# EAGLE board schematic2 (EAGLE 9.5.1)
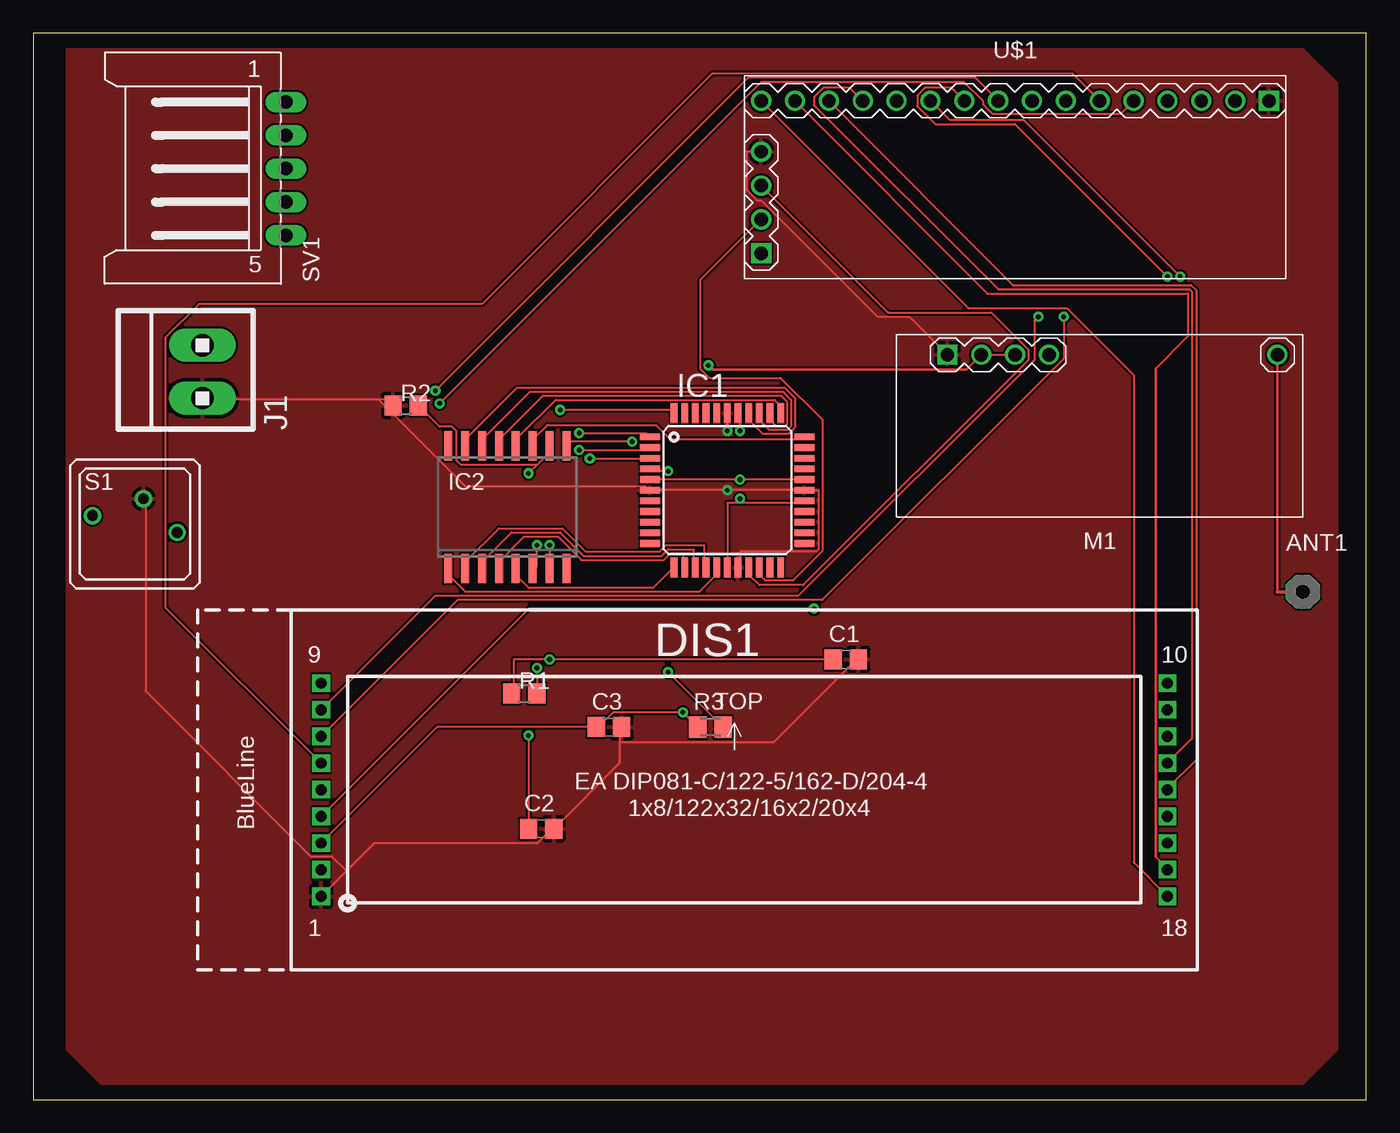
[diagram p0: board, top side]
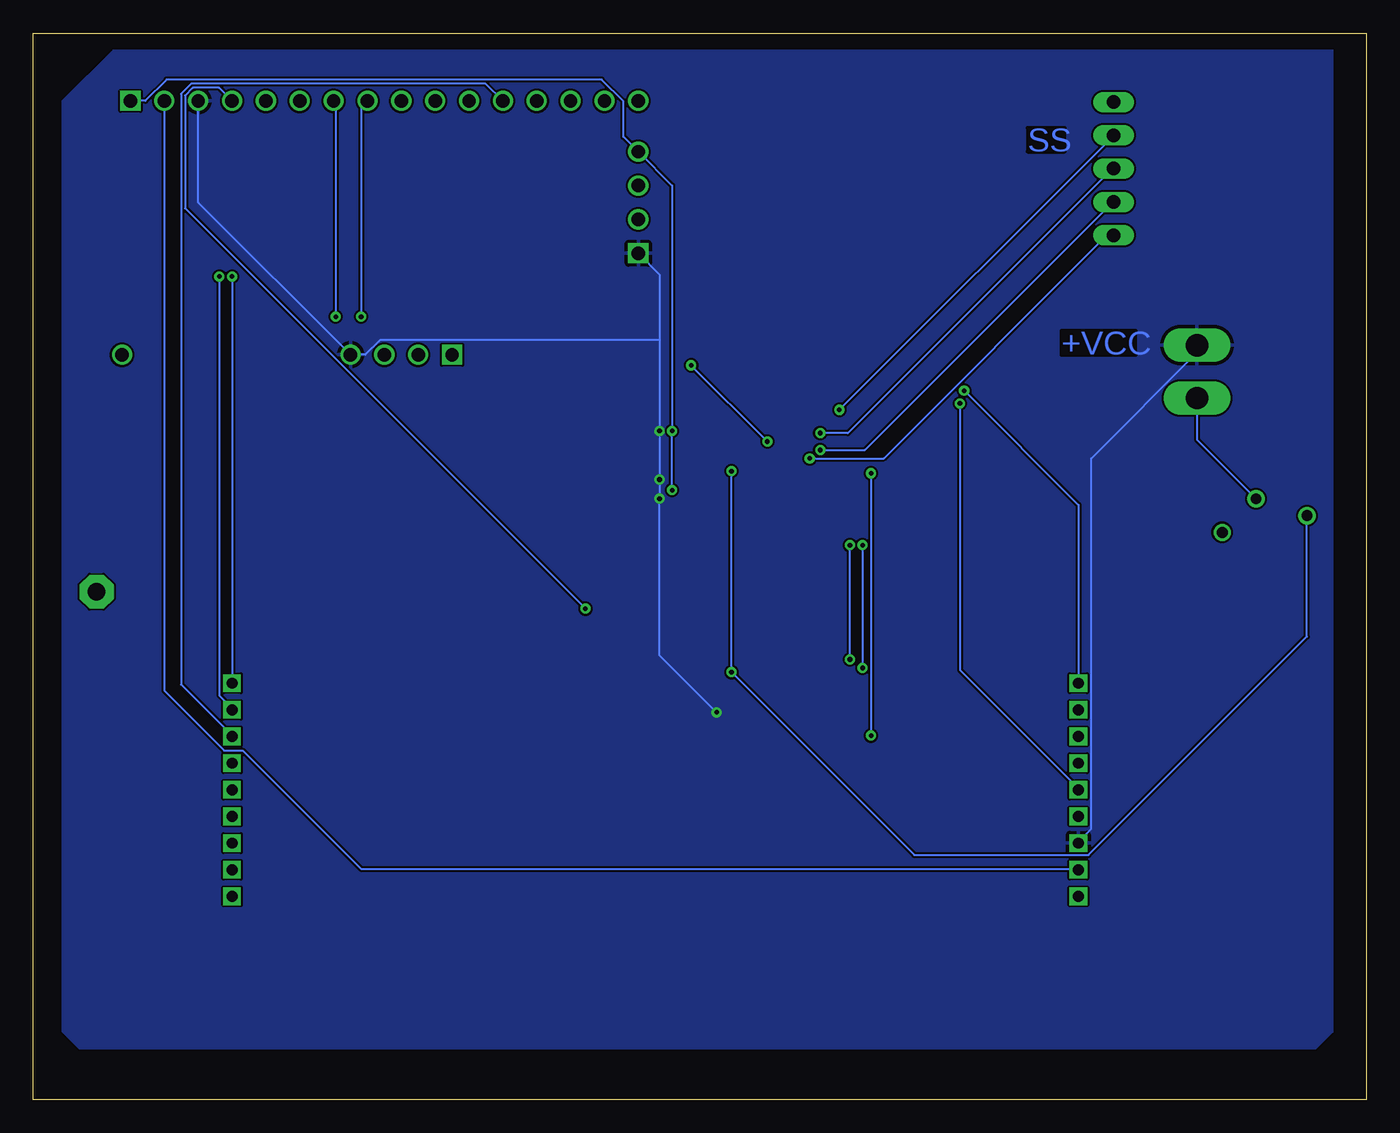
[diagram p1: board, bottom side, seen from below]

Size 100 x 80 mm. Coordinates in mm from the lower left corner, seen from the top.
Outline: 0,0 100,0 100,80 0,80 0,0
Copper layers (1*16): Top 0.035mm / dielectric 1.5mm / Bottom 0.035mm
Design rules "default": minimum track width 6mil, minimum drill 0.35mm, track to track 6mil, track to pad 6mil, pad to pad 6mil, via to via 6mil, smd to smd 6mil, copper to edge 40mil, drill to drill 6mil, minimum pad ring 10mil, minimum via ring 8mil, stop-mask expansion 4mil, vias tented up to drill 0mil, thermal gap 10mil

## Footprints (pad centres in the part's own frame; a part is rotated, then mirrored left to right if it is on the bottom)
PAD-01 = drill 1.321 pad 2.54 octagon: 1 0,0
C0805 = smd 1.3 x 1.5: 1 -0.95,0; 2 0.95,0
EA_DIP = drill 0.813 pad 1.27 square: 1 0,0; 2 0,2; 3 0,4; 4 0,6; 5 0,8; 6 0,10; 7 0,12; 8 0,14; 9 0,16; 10 63.5,16; 11 63.5,14; 12 63.5,12; 13 63.5,10; 14 63.5,8; 15 63.5,6; 16 63.5,4; 17 63.5,2; 18 63.5,0
TQFP44 = smd 1.5 x 0.5: 1 -5.8,4; 2 -5.8,3.2; 3 -5.8,2.4; 4 -5.8,1.6; 5 -5.8,0.8; 6 -5.8,0; 7 -5.8,-0.8; 8 -5.8,-1.6; 9 -5.8,-2.4; 10 -5.8,-3.2; 11 -5.8,-4; 23 5.8,-4; 24 5.8,-3.2; 25 5.8,-2.4; 26 5.8,-1.6; 27 5.8,-0.8; 28 5.8,0; 29 5.8,0.8; 30 5.8,1.6; 31 5.8,2.4; 32 5.8,3.2; 33 5.8,4 | smd 0.5 x 1.5: 12 -4,-5.8; 13 -3.2,-5.8; 14 -2.4,-5.8; 15 -1.6,-5.8; 16 -0.8,-5.8; 17 0,-5.8; 18 0.8,-5.8; 19 1.6,-5.8; 20 2.4,-5.8; 21 3.2,-5.8; 22 4,-5.8; 34 4,5.8; 35 3.2,5.8; 36 2.4,5.8; 37 1.6,5.8; 38 0.8,5.8; 39 0,5.8; 40 -0.8,5.8; 41 -1.6,5.8; 42 -2.4,5.8; 43 -3.2,5.8; 44 -4,5.8
SO16W = smd 0.6 x 2.2: 1 -4.445,-4.6; 2 -3.175,-4.6; 3 -1.905,-4.6; 4 -0.635,-4.6; 5 0.635,-4.6; 6 1.905,-4.6; 7 3.175,-4.6; 8 4.445,-4.6; 9 4.445,4.6; 10 3.175,4.6; 11 1.905,4.6; 12 0.635,4.6; 13 -0.635,4.6; 14 -1.905,4.6; 15 -3.175,4.6; 16 -4.445,4.6
1X2MTA = drill 1.676 long: 1 1.981,0; 2 -1.981,0
WIRELESS-XY-MK-5V = drill 1 square: 1 11.43,-5.08 | drill 1: 2 8.89,-5.08; 3 6.35,-5.08; 4 3.81,-5.08; ANT -13.335,-5.08
R0805 = smd 1.3 x 1.5: 1 -0.95,0; 2 0.95,0
M0805 = smd 1.3 x 1.6: 1 -0.95,0; 2 0.95,0
RDT1034 = drill 0.8: A 3.175,-0.635; A1 -3.175,0.635; B 0.65,1.9
L05P = drill 1.016 long: 1 5,-6.25; 2 2.5,-6.25; 3 0,-6.25; 4 -2.5,-6.25; 5 -5,-6.25
LCD-I2C-CONVERTER = drill 1 square: J1.1 -19.05,-5.08; J2.1 19.05,6.35 | drill 1: J1.2 -19.05,-2.54; J1.3 -19.05,0; J1.4 -19.05,2.54; J2.2 16.51,6.35; J2.3 13.97,6.35; J2.4 11.43,6.35; J2.5 8.89,6.35; J2.6 6.35,6.35; J2.7 3.81,6.35; J2.8 1.27,6.35; J2.9 -1.27,6.35; J2.10 -3.81,6.35; J2.11 -6.35,6.35; J2.12 -8.89,6.35; J2.13 -11.43,6.35; J2.14 -13.97,6.35; J2.15 -16.51,6.35; J2.16 -19.05,6.35

## Placement (x,y rotation side)
ANT1  [PAD-01]  95.25,38.1 0 top
C1  470pF  [C0805]  60.96,33.02 0 top
C2  910pF  [C0805]  38.1,20.32 0 top
C3  0.1uF  [C0805]  43.18,27.94 0 top
DIS1  EA_DIP  [EA_DIP]  21.59,15.24 0 top
IC1  MEGA16-A  [TQFP44]  52.07,45.72 0 top
IC2  MC145027DW  [SO16W]  35.56,44.45 0 top
J1  [1X2MTA]  12.7,54.61 90 top
M1  WIRELESS-XY-MK-5V  [WIRELESS-XY-MK-5V]  80.01,50.8 180 top
R1  10k  [R0805]  36.83,30.48 0 top
R2  100k  [R0805]  27.94,52.07 0 top
R3  1k  [M0805]  50.8,27.94 0 top
S1  RDT1034  [RDT1034]  7.62,43.18 0 top
SV1  [L05P]  12.7,69.85 90 top
U$1  LCD-I2C-CONVERTER  [LCD-I2C-CONVERTER]  73.66,68.58 0 top

## Library data of the parts
ANT1 = discrete
C1-C3 = rcl; SPICEPREFIX: C
DIS1 = display-lcd
IC1 = atmel; MPN: ATMEGA16-16AU; OC_FARNELL: 9171134; OC_NEWARK: 96K6515
IC2 = micro-motorola; OC_FARNELL: unknown; OC_NEWARK: unknown
J1 = con-amp
M1 U$1 = diy-modules
R1-R3 = rcl; SPICEPREFIX: R
S1 = switch
SV1 = con-amp-mt; OC_FARNELL: unknown; OC_NEWARK: unknown

## Nets
GND: C1.2 C2.2 C3.2 DIS1.1 IC1.6 IC1.18 IC1.28 IC1.39 J1.2 M1.1 R2.1 S1.B U$1.J1.4 U$1.J2.1
N$1: IC1.16 IC2.1
N$2: IC1.15 IC2.2
N$3: IC1.14 IC2.3
N$4: IC1.13 IC2.4
N$5: IC1.12 IC2.5
N$6: IC1.35 IC2.13
N$7: IC1.37 IC2.15
N$8: IC1.36 IC2.14
N$9: IC1.34 IC2.12
N$10: IC2.6 R1.2
N$11: C1.1 IC2.7 R1.1
N$12: C2.1 IC2.10 R2.2
N$13: IC2.9 M1.2 M1.3
N$14: IC1.3 SV1.5
N$15: ANT1.1 M1.ANT
N$16: IC1.2 SV1.4
N$17: IC1.1 SV1.3
N$18: IC1.44 SV1.2
N$19: IC1.4 R3.2 S1.A1
N$20: IC1.33 IC2.11
N$21: IC1.19 U$1.J1.3
N$22: IC1.20 U$1.J1.2
N$23: DIS1.7 U$1.J2.7
N$24: DIS1.4 U$1.J2.4
N$26: DIS1.5 U$1.J2.5
N$27: DIS1.6 U$1.J2.6
N$28: DIS1.8 U$1.J2.8
N$29: DIS1.9 U$1.J2.9
N$30: DIS1.10 U$1.J2.10
N$31: DIS1.11 U$1.J2.11
N$32: DIS1.12 U$1.J2.12
N$33: DIS1.2 U$1.J2.2
N$34: DIS1.13 U$1.J2.13
N$36: DIS1.17 U$1.J2.15
N$37: DIS1.18 U$1.J2.16
N$38: DIS1.14 U$1.J2.14
VCC: C3.1 DIS1.3 IC1.5 IC1.17 IC1.27 IC1.29 IC1.38 J1.1 M1.4 R3.1 U$1.J1.1 U$1.J2.3
VDD: IC2.16
VSS: IC2.8

## Tracks (layer width: path | path; a pad name or v marks a point on that pad's centre or on a via)
GND  (via drill 0.35)
  Top 0.152: v52.07,50.16 IC1.39 | M1.1 65.72,58.74 63.34,58.74 54.61,67.47 54.29,67.47 53.5,68.26 53.5,71.12 U$1.J1.4 | 43.97,26.83 43.97,27.94 C3.2 | 43.97,26.83 43.97,25.24 C2.2 38.89,20.32 37.78,19.21 25.56,19.21 23.5,17.14 | 43.97,26.83 55.56,26.83 61.75,33.02 C1.2 | 23.5,17.14 DIS1.1 | IC1.18 53.02,40.01 53.02,41.12 58.74,41.12 58.9,41.27 58.9,45.72 IC1.28 v52.07,45.72 IC1.6 46.2,45.72 45.88,46.04 32.38,46.04 25.88,52.55 | 25.88,52.55 12.7,52.55 J1.2 | 25.88,52.55 26.51,52.55 R2.1 | 23.5,17.14 22.38,18.26 20.8,18.26 8.41,30.64 8.41,44.93 S1.B
  Bottom 0.152: U$1.J2.1 91.6,74.93 90.01,76.52 57.35,76.52 55.72,74.89 55.72,72.23 U$1.J1.4 52.07,68.58 v52.07,50.16 v52.07,45.72 | J1.2 12.7,49.51 S1.B
  pour Top (rank 6): 2.54,78.74 2.54,3.81 5.08,1.27 95.25,1.27 96.52,2.54 97.79,3.81 97.79,76.2 95.25,78.74 93.98,78.74
N$1
  Top 0.152: IC1.16 51.12,39.77 51.12,39.24 49.99,38.11 32.4,38.11 31.11,39.4 IC2.1
N$2
  Top 0.152: IC2.2 32.38,40.32 34.92,42.86 39.69,42.86 41.43,41.12 46.99,41.12 47.47,41.59 50.32,41.59 50.32,40.01 IC1.15
N$3
  Top 0.152: IC2.3 33.66,40.32 35.88,42.55 39.53,42.55 41.27,40.8 47.15,40.8 47.62,41.27 49.53,41.27 49.53,40.01 IC1.14
N$4
  Top 0.152: IC2.4 34.92,40.32 36.83,42.23 39.37,42.23 41.12,40.48 47.31,40.48 47.78,40.96 48.74,40.96 48.74,40.01 IC1.13
N$5
  Top 0.152: IC2.5 36.2,39.37 37.15,38.42 46.51,38.42 47.94,39.85 IC1.12
N$6
  Top 0.152: IC1.35 55.4,51.39 55.4,50.86 55.73,50.54 56.41,50.54 56.55,50.67 56.55,52.37 56.11,52.8 38.23,52.8 34.92,49.5 IC2.13
N$7
  Top 0.152: IC1.37 53.82,51.37 53.82,50.85 54.73,49.93 56.67,49.93 57.16,50.42 57.16,52.62 56.36,53.41 36.3,53.41 32.38,49.5 IC2.15
N$8
  Top 0.152: IC1.36 54.61,51.38 54.61,50.86 55.23,50.24 56.54,50.24 56.85,50.55 56.85,52.49 56.24,53.11 37.26,53.11 33.66,49.5 IC2.14
N$9
  Top 0.152: IC1.34 56.04,51.55 56.04,52.08 55.62,52.5 39.19,52.5 36.2,49.5 IC2.12
N$10  (via drill 0.35)
  Top 0.152: v37.78,32.38 R1.2 | v37.78,41.59 37.78,40.01 37.47,40.01 IC2.6
  Bottom 0.152: v37.78,41.59 v37.78,32.38
N$11  (via drill 0.35)
  Top 0.152: C1.1 v38.73,33.02 36.04,33.02 36.04,30.48 R1.1 | v38.73,41.59 IC2.7
  Bottom 0.152: v38.73,33.02 v38.73,41.59
N$12  (via drill 0.35)
  Top 0.152: v37.15,27.3 C2.1 | 37.78,47.62 38.73,48.58 IC2.10 | 37.78,47.62 v37.15,46.99 | R2.2 30.48,50.48 31.41,50.48 31.75,50.14 31.75,47.96 32.09,47.62 37.78,47.62
  Bottom 0.152: v37.15,46.99 v37.15,27.3
N$13  (via drill 0.35)
  Top 0.152: 50.96,54.77 v50.64,55.09 | 70.01,54.77 M1.2 M1.3 | v44.93,49.37 40.33,49.37 IC2.9
  Top 0.2: 70.01,54.77 50.96,54.77
  Bottom 0.2: v50.64,55.09 v44.93,49.37
N$14  (via drill 0.35)
  Top 0.152: v41.75,48.1 46.25,48.1 IC1.3
  Bottom 0.152: v41.75,48.1 36.2,48.1 19.53,64.77 19.03,64.77 SV1.5
N$15
  Top 0.2: 93.34,38.1 M1.ANT
  Top 0.254: ANT1.1 93.34,38.1
N$16  (via drill 0.35)
  Top 0.152: v40.96,48.74 46.04,48.74 46.22,48.92 IC1.2
  Bottom 0.152: v40.96,48.74 37.62,48.74 19.01,67.35 SV1.4
N$17  (via drill 0.35)
  Top 0.152: v40.96,50.01 45.98,50.01 IC1.1
  Bottom 0.152: v40.96,50.01 38.89,50.01 19.05,69.85 SV1.3
N$18  (via drill 0.35)
  Top 0.152: v39.53,51.75 47.78,51.75 48.02,51.52 IC1.44
  Bottom 0.152: SV1.2 18.95,72.33 v39.53,51.75
N$19  (via drill 0.35)
  Top 0.152: v47.62,47.15 46.51,47.15 46.35,47.31 IC1.4 | v47.62,32.07 R3.2
  Bottom 0.152: v47.62,47.15 v47.62,32.07 33.91,18.35 20.84,18.35 4.45,34.74 S1.A1
N$20
  Top 0.152: IC1.33 57.82,49.72 57.65,49.56 47.76,49.56 46.7,50.61 38.58,50.61 37.47,49.5 IC2.11
N$21
  Top 0.152: U$1.J1.3 64.14,59.05 71.88,59.05 74.64,56.29 74.64,55.47 57.76,38.59 54.48,38.59 53.82,39.25 53.82,39.77 IC1.19
N$22
  Top 0.152: IC1.20 54.61,39.78 54.61,39.26 54.92,38.94 56.99,38.94 59.2,41.15 59.2,51.01 56.07,54.13 50.74,54.13 50.03,54.84 50.03,61.46 U$1.J1.2
N$23  (via drill 0.35)
  Top 0.152: v77.31,58.74 77.31,55.6 59.17,37.47 31.82,37.47 DIS1.7
  Bottom 0.152: v77.31,58.74 77.31,74.77 U$1.J2.7
N$24  (via drill 0.35)
  Top 0.152: v58.58,36.83 37.18,36.83 DIS1.4
  Bottom 0.152: U$1.J2.4 86.07,75.91 88.04,75.91 88.61,75.34 88.61,66.86 v58.58,36.83
N$26  (via drill 0.35)
  Top 0.152: U$1.J2.5 81.57,73.95 71.98,73.95 71.28,74.65 71.28,74.89 69.82,76.35 54.6,76.35 v30.48,52.23
  Bottom 0.152: v30.48,52.23 30.48,32.23 21.59,23.34 DIS1.5
N$27
  Top 0.152: DIS1.6 9.91,36.92 9.91,57.16 12.44,59.69 33.66,59.69 50.92,76.96 77.98,76.96 U$1.J2.6
N$28  (via drill 0.35)
  Top 0.152: v75.41,58.74 75.09,58.42 75.09,55.49 57.38,37.78 30.13,37.78 DIS1.8
  Bottom 0.152: v75.41,58.74 75.41,74.45 U$1.J2.8
N$29  (via drill 0.35)
  Top 0.152: U$1.J2.9 70.67,76.65 53.63,76.65 v30.16,53.18
  Bottom 0.152: DIS1.9 21.59,44.61 v30.16,53.18
N$30  (via drill 0.35)
  Top 0.152: v85.09,61.75 73.66,73.18 67.67,73.18 66.33,74.52 66.33,75.34 66.9,75.91 68.87,75.91 U$1.J2.10
  Bottom 0.152: v85.09,61.75 DIS1.10
N$31  (via drill 0.35)
  Top 0.152: v86.04,61.75 74.3,73.5 68.74,73.5 U$1.J2.11
  Bottom 0.152: v86.04,61.75 86.04,30.32 85.09,29.37 DIS1.11
N$32
  Bottom 0.152: DIS1.12 85.09,27.3 88.92,31.13 88.92,75.46 88.16,76.22 66.06,76.22 U$1.J2.12
N$33
  Bottom 0.152: DIS1.2 21.65,17.3 75.41,17.3 84.3,26.19 85.69,26.19 90.17,30.68 U$1.J2.2
N$34
  Top 0.152: DIS1.13 86.94,27.09 86.94,60.61 86.75,60.8 72.39,60.8 | 58.58,74.61 58.58,75.21 59.28,75.91 61.25,75.91 U$1.J2.13
  Top 0.2: 58.58,74.61 72.39,60.8
N$36
  Top 0.152: DIS1.17 85.09,17.3 84.2,18.19 | 71.6,60.48 86.63,60.48 86.63,57.26 84.2,54.83
  Top 0.2: U$1.J2.15 71.6,60.48 | 84.2,54.83 84.2,18.19
N$37
  Top 0.152: DIS1.18 82.55,17.78 82.55,54.36 77.53,59.37 70.17,59.37
  Top 0.2: U$1.J2.16 70.17,59.37
N$38
  Top 0.152: DIS1.14 85.09,23.34 87.24,25.49 87.24,60.74 86.86,61.12 73.5,61.12
  Top 0.2: U$1.J2.14 73.5,61.12
VCC  (via drill 0.35)
  Top 0.152: IC1.5 46.35,46.51 v53.02,46.51 57.78,46.51 IC1.29 | IC1.17 52.07,44.77 53.02,44.77 | 53.02,44.77 57.78,44.77 IC1.27 | v53.02,50.16 53.02,51.44 IC1.38 | v53.02,45.09 53.02,44.77 | R3.1 v48.74,29.05 43.5,29.05 42.39,27.94 C3.1 30.29,27.94 DIS1.3
  Bottom 0.152: 53.02,56.99 53.02,61.91 U$1.J1.1 | 53.02,56.99 v53.02,50.16 v53.02,46.51 v53.02,45.09 53.02,33.34 v48.74,29.05 | 53.02,56.99 73.98,56.99 75.09,55.88 M1.4 87.63,67.31 U$1.J2.3 | J1.1 12.7,56.04 20.64,48.1 20.64,20.32 21.59,19.37 DIS1.3
  pour Bottom: 2.54,78.74 2.54,5.08 3.81,3.81 96.52,3.81 97.79,5.08 97.79,74.93 93.98,78.74

## Text on the board
Bottom: SS | +VCC